# EAGLE board NANDGATE (EAGLE 6.5.0)
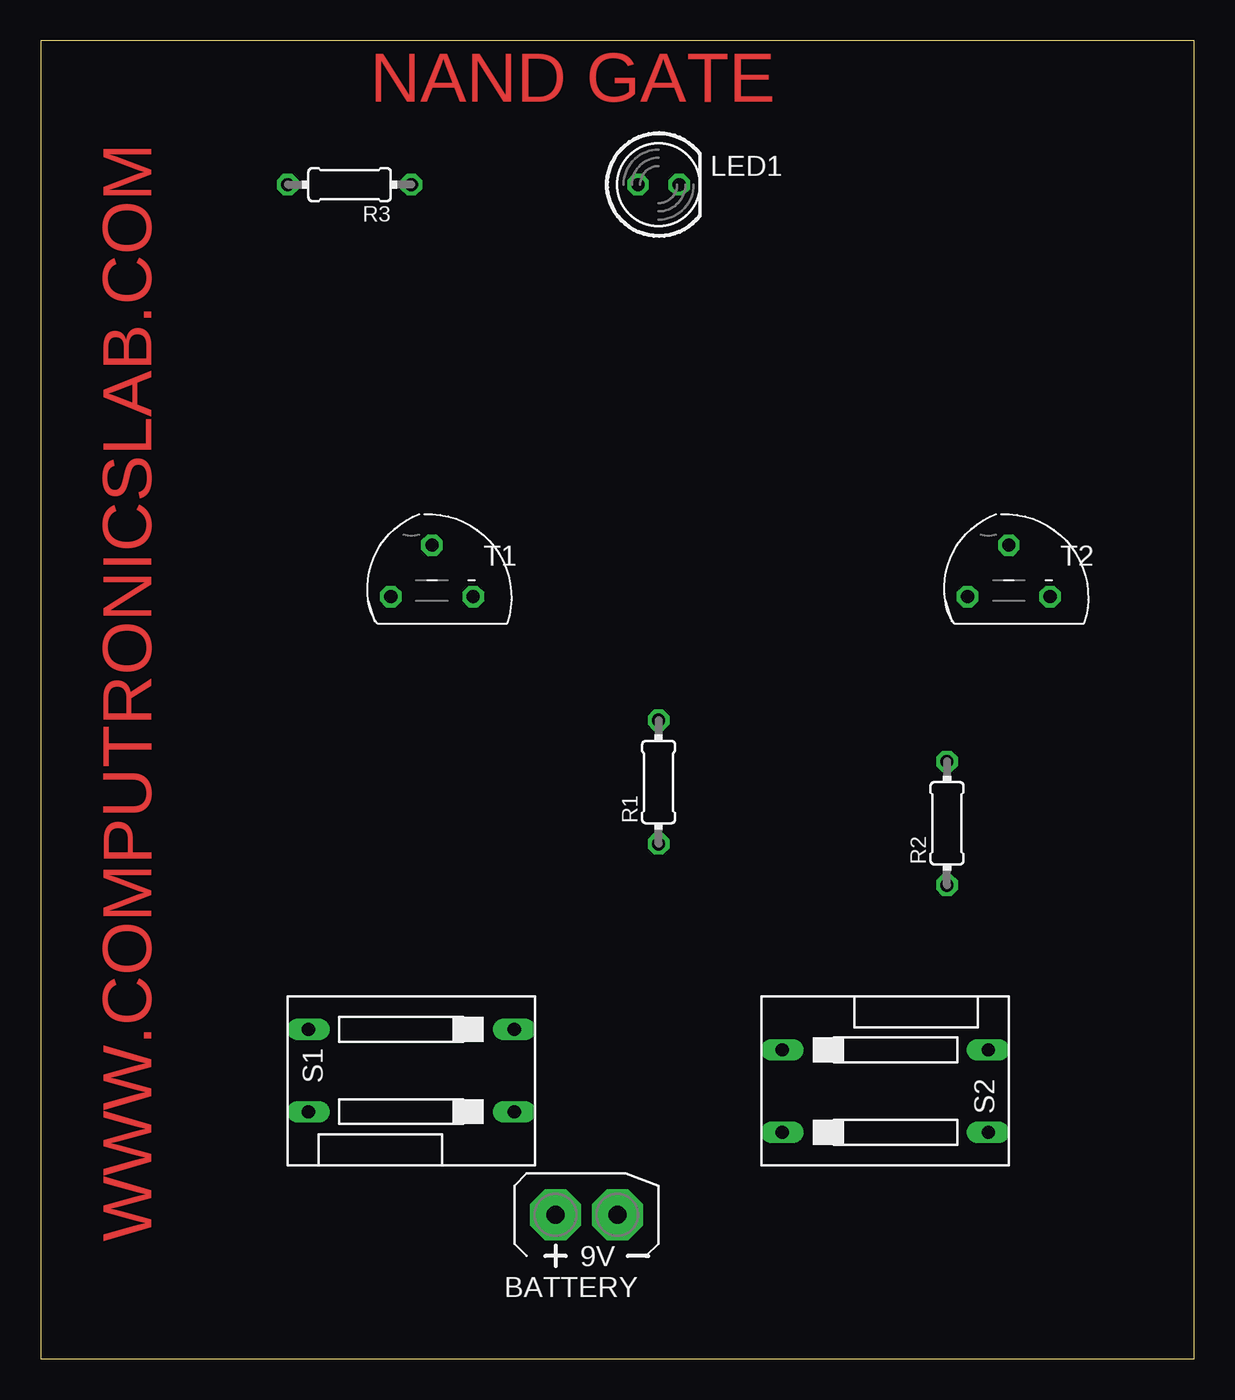
[diagram p0: board, top side]
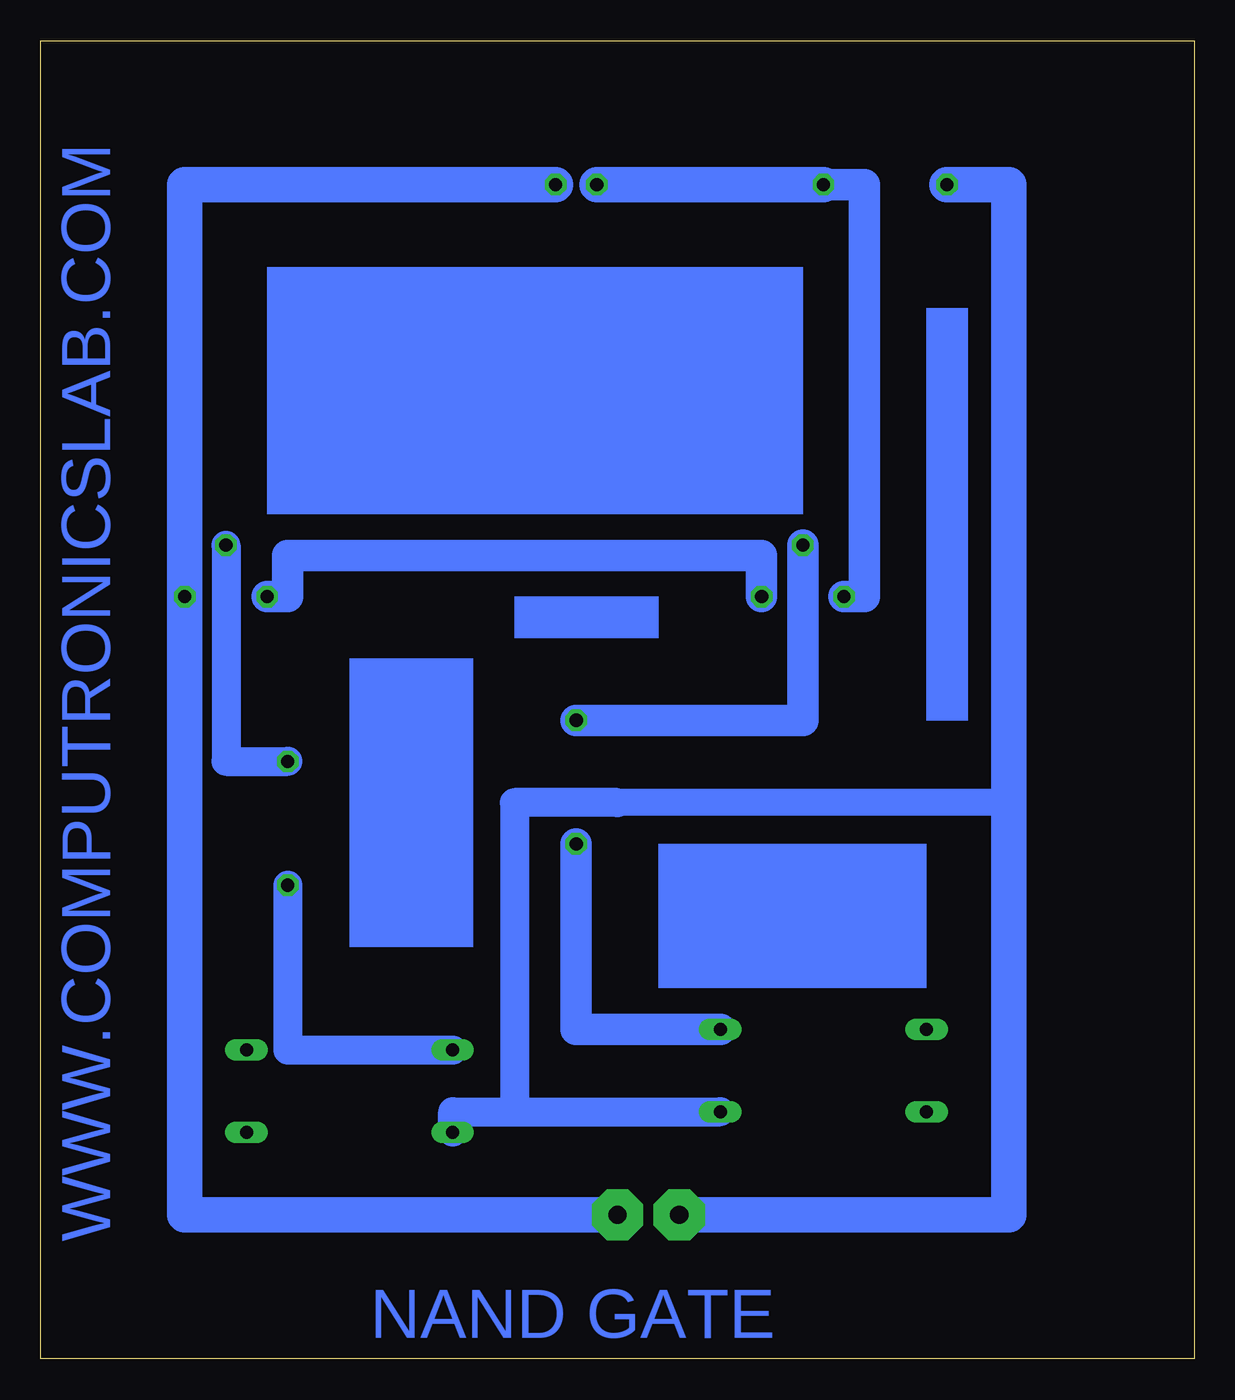
[diagram p1: board, bottom side, seen from below]

Size 71.12 x 81.27 mm. Coordinates in mm from the lower left corner, seen from the top.
Outline: 0,0 71.12,0 71.12,81.27 0,81.27 0,0
Copper layers (1*16): Top 0.035mm / dielectric 1.5mm / Bottom 0.035mm
Design rules "default": minimum track width 10mil, minimum drill 24mil, track to track 8mil, track to pad 8mil, pad to pad 8mil, via to via 8mil, smd to smd 8mil, copper to edge 40mil, drill to drill 8mil, minimum pad ring 10mil, minimum via ring 8mil, stop-mask expansion 4mil, vias tented up to drill 0mil, thermal gap 10mil

## Footprints (pad centres in the part's own frame; a part is rotated, then mirrored left to right if it is on the bottom)
AB9V = drill 1.118 pad 3.15 octagon: + 0,2.54; - 0,-1.27
LED5MM = drill 0.813 octagon: A -1.27,0; K 1.27,0
0204/7 = drill 0.813 octagon: 1 -3.81,0; 2 3.81,0
DS-02 = drill 0.813 long: 1 -5.08,-6.35; 2 0,-6.35; 3 0,6.35; 4 -5.08,6.35
TO92 = drill 0.813 octagon: 1 2.54,-1.27; 2 0,1.905; 3 -2.54,-1.27

## Placement (x,y rotation side)
BATTERY  9V  [AB9V]  34.29,8.89 90 top
LED1  5MM  [LED5MM]  38.1,72.39 0 top
R1  10K  [0204/7]  38.1,35.56 90 top
R2  10K  [0204/7]  55.88,33.02 90 top
R3  330E  [0204/7]  19.05,72.39 180 top
S1  PUSH SWITCH  [DS-02]  22.86,20.32 90 top
S2  PUSH SWITCH  [DS-02]  52.07,13.97 270 top
T1  BC547  [TO92]  24.13,48.26 0 top
T2  BC547  [TO92]  59.69,48.26 0 top

## Library data of the parts
BATTERY = battery
LED1 = led
R1-R3 = eagle-ltspice; SPICEMODEL: NONE; SPICEPREFIX: R
S1 S2 = switch-dil; OC_FARNELL: 9472126; OC_NEWARK: unknown
T1 T2 = transistor

## Nets
N$1: R1.2 T1.2
N$2: R2.2 T2.2
N$3: T1.1 T2.3
N$4: LED1.A R3.1 T1.3
N$6: BATTERY.+ R3.2 S1.1 S2.2
N$7: BATTERY.- LED1.K T2.1
N$8: R2.1 S2.1
N$9: R1.1 S1.2

## Tracks (layer width: path | path; a pad name or v marks a point on that pad's centre or on a via)
N$1
  Bottom 1.93: T1.2 24.13,39.37 R1.2
N$2
  Bottom 1.778: T2.2 59.69,36.83 R2.2
N$3
  Bottom 1.93: T1.1 26.67,49.53 55.88,49.53 55.88,46.99 T2.3
N$4
  Bottom 1.93: 26.67,72.39 20.32,72.39 20.32,46.99 T1.3
  Bottom 2.184: R3.1 26.67,72.39 LED1.A
N$6
  Bottom 1.676: 11.43,34.29 35.56,34.29
  Bottom 1.778: S2.2 45.72,15.24 41.91,15.24 | 41.91,15.24 S1.1 | 35.56,34.29 41.91,34.29 41.91,15.24
  Bottom 2.184: BATTERY.+ 11.43,8.89 11.43,34.29 11.43,72.39 R3.2
N$7
  Bottom 2.184: LED1.K 62.23,72.39 T2.1 62.23,8.89 BATTERY.-
N$8
  Bottom 1.778: R2.1 55.88,19.05 S2.1
N$9
  Bottom 1.93: R1.1 38.1,20.32 S1.2
(copper drawn outside any net)
  shapes: Bottom area x6

## Text on the board
Top: NAND GATE | WWW.COMPUTRONICSLAB.COM
Bottom: WWW.COMPUTRONICSLAB.COM | NAND GATE